# Altium PCB MB1134.PcbDoc (part 1 of 2)
Units mm, origin at the board's own origin, x right, y up, seen from the top; angles counter-clockwise.
Board outline 53.34 x 88.9 mm, 2 copper layers (Top Layer, Bottom Layer), stack 1.571 mm thick; 105 components, 124 nets, 401 pads, 201 vias.
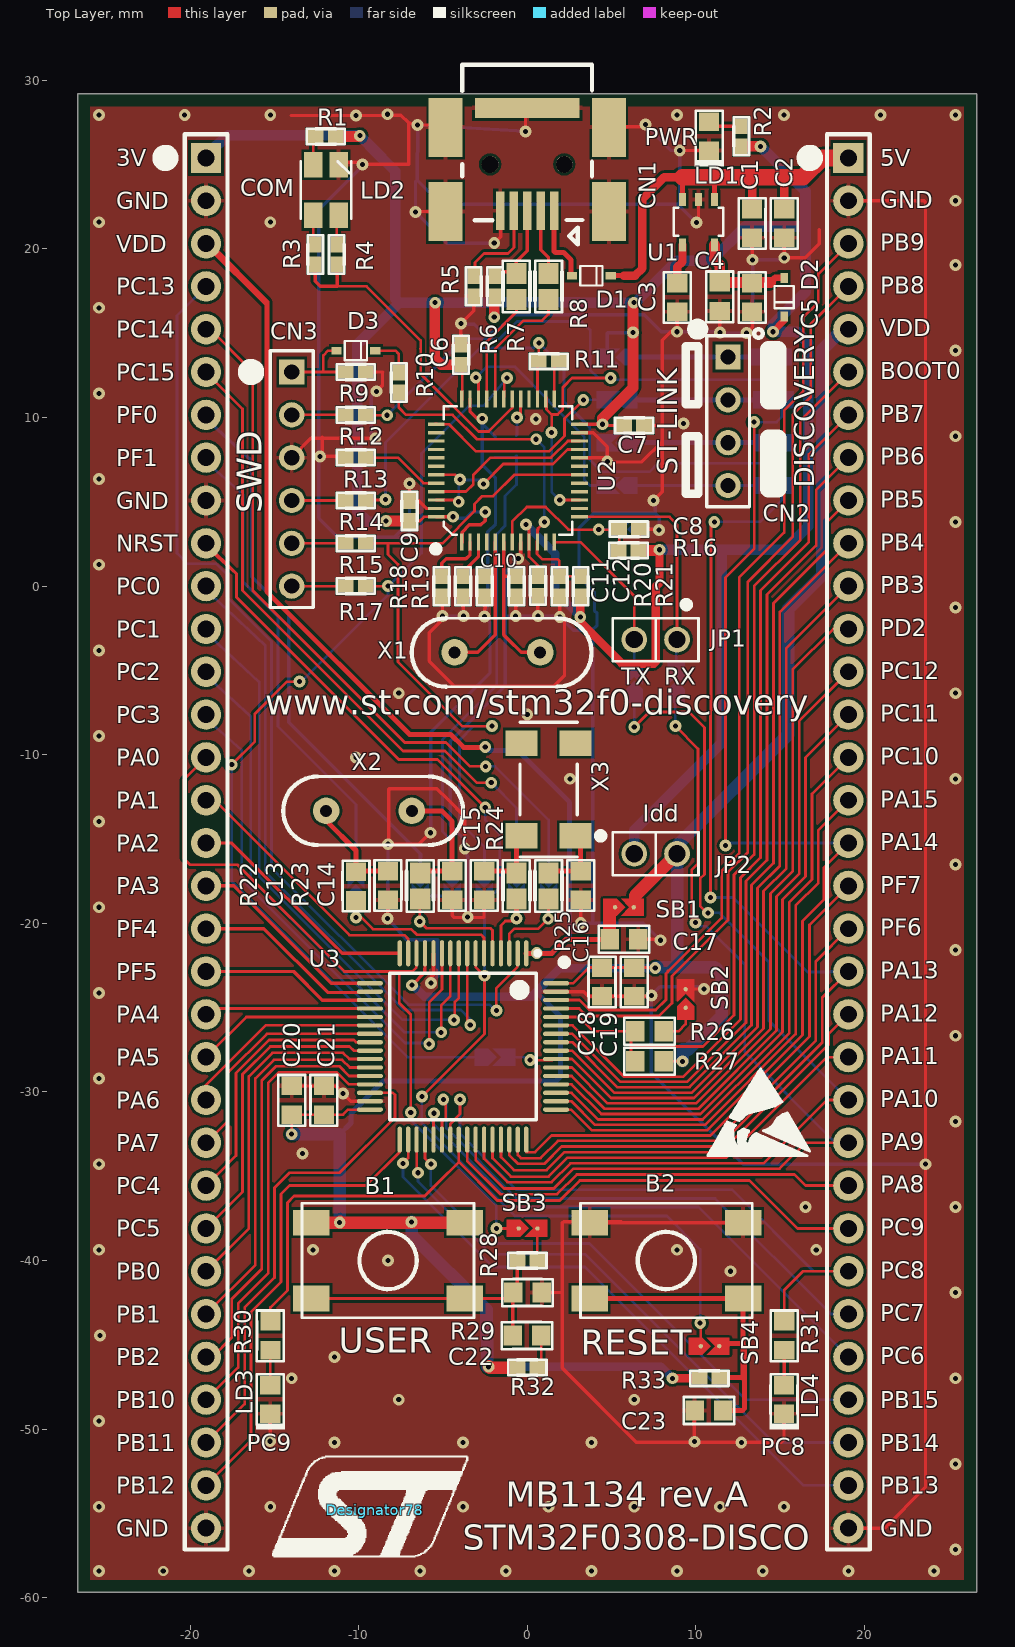
[diagram p0: Top Layer view]
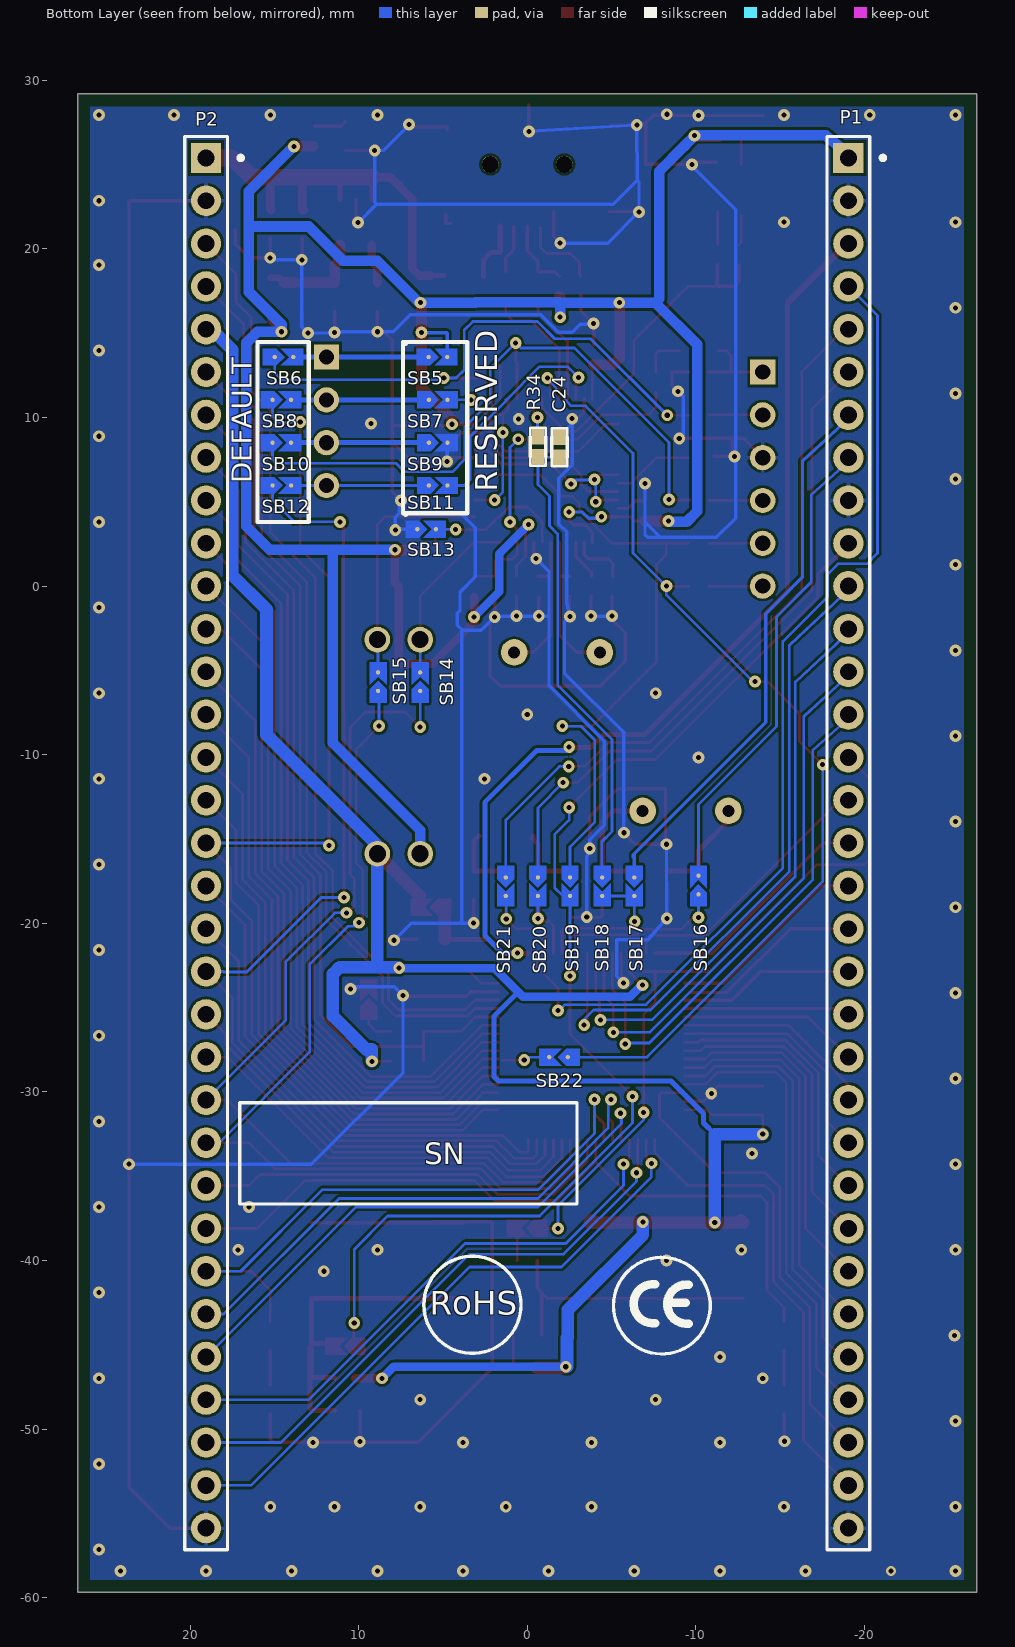
[diagram p1: Bottom Layer view, seen from below]

## Layer stack, top to bottom
Top Layer: signal copper 0.0356
Dielectric: core 1.5, FR-4, Dk 4.8
Bottom Layer: signal copper 0.0356

## Board outline
-26.67,-59.69 26.67,-59.69 26.67,29.21 -26.67,29.21

## Design rules (kind name [scope] priority, off if disabled: settings)
Clearance [All] p1: gap=0.15
ComponentClearance [All] p1: gap=0.254 collisioncheckmode=3 verticalgap=0.254
PolygonConnect PolygonConnect_1 [isvia] p1: connectstyle=Direct reliefconductorwidth=0.254 reliefentries=4 polygonreliefangle="90 Angle"
PolygonConnect [All] p2: connectstyle=Relief reliefconductorwidth=0.254 reliefentries=4 polygonreliefangle="90 Angle"
RoutingVias [All] p1: holewidth=0.711 width=0.7 viastyle="Through Hole" minholewidth=0.3 minwidth=0.7 maxholewidth=0.3 maxwidth=1.27
SolderMaskExpansion [All] p1: expansion=0.05
TestPointUsage [All] p1: valid=0 allowmultiple=FALSE
Testpoint [All] p1: side=3 testpointundercomponent=TRUE minsize=1.016 maxsize=2.54 preferedsize=1.524 minholesize=0 maxholesize=1.016 preferedholesize=0.813 testpointgrid=0.025 style=297 order=0123456789
Width [All] p1: maxlimit=1 minlimit=0.15 preferedwidth=0.16
18 further rules are at their usual default settings.

## Classes and differential pairs
component class MB1034: P1 P2

## Components (designator, comment, footprint, x,y, rotation, side; value= is the part's Value field where it differs from the comment)
B1 "SW-PUSH-CMS" BP1CMS -8.255,-40.005 r270 top (schematic designator B2)
B2 "SW-PUSH-CMS" BP1CMS 8.255,-40.005 r90 top (schematic designator B1)
C1 "1µF_X5R_0603" 0603C 13.335,21.539 r90 top (schematic designator C9)
C2 "100nF" 0603C 15.24,21.539 r90 top (schematic designator C13)
C3 "10nF_X7R_0603" 0603C 8.89,17.145 r90 top (schematic designator C11)
C4 "1µF_X5R_0603" 0603C 11.43,17.145 r270 top (schematic designator C10)
C5 "100nF" 0603C 13.335,17.145 r90 top (schematic designator C12)
C6 "100nF" 0402C -3.937,13.716 r0 top (schematic designator C5)
C7 "100nF" 0402C 6.325,9.525 r270 top (schematic designator C6)
C8 "100nF" 0402C 6.02,3.378 r270 top (schematic designator C3)
C9 "100nF" 0402C -6.985,4.445 r0 top (schematic designator C8)
C10 "20pF" 0402C -2.54,0 r180 top (schematic designator C1)
C11 "20pF" 0402C -0.635,0 r180 top (schematic designator C2)
C12 "100nF" 0402C 0.635,0 r0 top (schematic designator C7)
C13 "20pF" 0603C -8.255,-17.78 r270 top (schematic designator C24)
C14 "20pF" 0603C -4.445,-17.78 r270 top (schematic designator C23)
C15 "6.8pF" 0603C -2.54,-17.78 r270 top (schematic designator C17)
C16 "6.8pF" 0603C 3.175,-17.78 r270 top
C17 "1uF" 0603C 5.715,-20.955 r180 top (schematic designator C15)
C18 "1uF" 0603C 4.445,-23.495 r270 top (schematic designator C21)
C19 "100nF" 0603C 6.35,-23.495 r270 top (schematic designator C22)
C20 "100nF" 0603C -13.97,-30.48 r90 top
C21 "100nF" 0603C -12.065,-30.48 r90 top (schematic designator C19)
C22 "100nF" 0603C 0,-44.45 r0 top (schematic designator C18)
C23 "100nF" 0603C 10.795,-48.895 r0 top (schematic designator C14)
C24 "20pF" 0402C -1.905,8.255 r0 bottom (schematic designator C4)
CN1 "5075BMR-05-SM" USB-MINI-B-SMD 0,25.019 r0 top (schematic designator CN3)
CN2 "Header 4" "Header 4" 11.913,13.589 r270 top
CN3 "Header 6" HDR1X6 -13.97,12.7 r270 top (schematic designator CN1)
D1 "BAT60JFILM" SOD323/A 3.81,18.415 r180 top (schematic designator D3)
D2 "BAT60JFILM" SOD323/A 15.24,17.145 r90 top
D3 "BAT60JFILM" SOD323/A -10.16,13.97 r180 top (schematic designator D1)
Designator2 "Comment" LOGO_ST_2012_12mm_TO -84.531,-154.102 r180 bottom
Designator3 "Comment" LOGO_ST_2012_12mm_TO 73.838,-153.848 r0 top
Designator78 "Comment" LOGO_ST_2012_12mm_TO -9.042,-54.788 r0 top
JP1 "" SIP2/2.54 8.89,-3.175 r180 top (schematic designator JP2)
JP2 "" SIP2/2.54 6.35,-15.875 r0 top (schematic designator JP3)
LD1 "RED" 0603D 10.795,26.67 r270 top (schematic designator LD2)
LD2 "LD_BICOLOR_CMS" HSMF-A201 -11.938,23.495 r270 top (schematic designator LD1)
LD3 "green" 0603D -15.24,-48.26 r270 top
LD4 "blue" 0603D 15.24,-48.26 r270 top
P1 "Header 33" HDR1X33 -19.05,25.4 r270 bottom
P2 "Header 33" HDR1X33 19.05,25.4 r270 bottom
R1 "0" 0402R -11.938,26.67 r90 top (schematic designator R18)
R2 "1K" 0402R 12.7,26.67 r0 top (schematic designator R16)
R3 "100" 0402R -12.573,19.685 r180 top (schematic designator R17)
R4 "100" 0402R -11.303,19.685 r180 top (schematic designator R15)
R5 "100K" 0402R -3.175,17.78 r0 top (schematic designator R22)
R6 "1K5" 0402R -1.905,17.78 r0 top (schematic designator R19)
R7 "0" 0603R-GS -0.635,17.78 r270 top (schematic designator R21)
R8 "0" 0603R-GS 1.27,17.78 r270 top (schematic designator R20)
R9 "10K" 0402R -10.16,12.7 r90 top (schematic designator R3)
R10 "100" 0402R -7.62,12.065 r0 top (schematic designator R5)
R11 "100" 0402R 1.27,13.335 r270 top (schematic designator R13)
R12 "22" 0402R -10.16,10.16 r90 top (schematic designator R6)
R13 "100K" 0402R -10.16,7.62 r90 top (schematic designator R1)
R14 "22" 0402R -10.16,5.08 r90 top (schematic designator R7)
R15 "22" 0402R -10.16,2.54 r90 top (schematic designator R8)
R16 "100K" 0402R 6.02,2.108 r90 top (schematic designator R10)
R17 "22" 0402R -10.16,0 r90 top (schematic designator R9)
R18 "10K" 0402R -5.08,0 r180 top (schematic designator R2)
R19 "10K" 0402R -3.81,0 r180 top (schematic designator R4)
R20 "4K7" 0402R 3.175,0 r180 top (schematic designator R12)
R21 "4K7" 0402R 1.905,0 r180 top (schematic designator R14)
R22 "390" 0603R -10.16,-17.78 r90 top (schematic designator R34)
R23 "0" 0603R-GS -6.35,-17.78 r270 top (schematic designator R33)
R24 "0" 0603R-GS -0.635,-17.78 r270 top (schematic designator R29)
R25 "0" 0603R-GS 1.27,-17.78 r270 top (schematic designator R28)
R26 "510" 0603R 7.239,-26.416 r180 top (schematic designator R27)
R27 "10K" 0603R 7.239,-28.194 r180 top (schematic designator R26)
R28 "330" 0402R 0,-40.005 r270 top (schematic designator R31)
R29 "220K" 0603R 0,-41.91 r180 top (schematic designator R32)
R30 "330" 0603R -15.24,-44.45 r90 top (schematic designator R23)
R31 "660" 0603R 15.24,-44.45 r90 top (schematic designator R24)
R32 "100" 0402R 0,-46.355 r270 top (schematic designator R30)
R33 "100K" 0402R 10.795,-46.99 r270 top (schematic designator R25)
R34 "100" 0402R -0.635,8.255 r180 bottom (schematic designator R11)
SB1 "Circuit Breaker" JP2_SMD 5.715,-19.05 r0 top (schematic designator SB14)
SB2 "Circuit Breaker" JP2_SMD 9.398,-24.511 r90 top (schematic designator SB13)
SB3 "Circuit Breaker" JP2_SMD 0,-38.1 r0 top (schematic designator SB17)
SB4 "Circuit Breaker" JP2_SMD 10.795,-45.085 r0 top (schematic designator SB12)
SB5 "Circuit Breaker" JP2_SMD 5.349,13.589 r180 bottom (schematic designator SB4)
SB6 "Circuit Breaker" JP2_SMD 14.478,13.589 r180 bottom (schematic designator SB3)
SB7 "Circuit Breaker" JP2_SMD 5.334,11.049 r180 bottom (schematic designator SB6)
SB8 "Circuit Breaker" JP2_SMD 14.605,11.049 r180 bottom (schematic designator SB5)
SB9 "Circuit Breaker" JP2_SMD 5.334,8.509 r180 bottom (schematic designator SB8)
SB10 "Circuit Breaker" JP2_SMD 14.605,8.509 r180 bottom (schematic designator SB7)
SB11 "Circuit Breaker" JP2_SMD 5.334,5.969 r180 bottom (schematic designator SB10)
SB12 "Circuit Breaker" JP2_SMD 14.605,5.969 r180 bottom (schematic designator SB9)
SB13 "Circuit Breaker" JP2_SMD 6.02,3.378 r180 bottom (schematic designator SB11)
SB14 "Circuit Breaker" JP2_SMD 6.35,-5.715 r90 bottom (schematic designator SB21)
SB15 "Circuit Breaker" JP2_SMD 8.846,-5.715 r90 bottom (schematic designator SB22)
SB16 "Circuit Breaker" JP2_SMD -10.16,-17.78 r90 bottom (schematic designator SB19)
SB17 "Circuit Breaker" JP2_SMD -6.35,-17.78 r270 bottom (schematic designator SB20)
SB18 "Circuit Breaker" JP2_SMD -4.445,-17.78 r270 bottom
SB19 "Circuit Breaker" JP2_SMD -2.54,-17.78 r270 bottom (schematic designator SB1)
SB20 "Circuit Breaker" JP2_SMD -0.635,-17.78 r270 bottom (schematic designator SB16)
SB21 "Circuit Breaker" JP2_SMD 1.27,-17.78 r270 bottom (schematic designator SB15)
SB22 "Circuit Breaker" JP2_SMD -1.905,-27.94 r0 bottom (schematic designator SB2)
U1 "LD3985M33R" SOT-23-5L 10.16,21.59 r270 top (schematic designator U2)
U2 "STM32F103C8T6" "QFP48 7X7" -1.143,6.858 r0 top (schematic designator U1)
U3 "STM32F051R8T6" LQFP64 -3.81,-27.305 r270 top
X1 "8MHz" XTAL1 0.762,-3.937 r180 top
X2 "8MHz" XTAL1 -6.858,-13.335 r180 top (schematic designator X3)
X3 "MC306-G-06Q-32.768 (JFVNY)" MC306-CRYSTAL 1.27,-12.065 r90 top (schematic designator X2)

## Footprints (in the part's own frame and the unit in brackets; to place one, negate y for a bottom-side part, rotate by r counter-clockwise, add the part's x,y. Pads: shape width x height; smd on the part's side, far side on the other; paste and mask are expansions set on the pad)
0402C [mil]
  rect 30x37 smd: 1(0,24) 2(0,-23)
  silkscreen extent -18,-44 18,45
0402R [mil]
  rect 30x37 smd: 1(0,24) 2(0,-23)
  silkscreen extent -18,-44 18,45
0603C [mm]
  rect 1.1x1.2 smd: 1(-0.869,-0.005) 2(0.831,-0.005)
  silkscreen extent -1.52,-0.81 1.48,0.79
0603D [mm]
  rect 1.1x1.2 smd: 1(-0.869,-0.005) 2(0.831,-0.005)
  silkscreen extent -1.52,-0.86 1.77,0.86
0603R [mm]
  rect 1.1x1.2 smd: 1(-0.869,-0.005) 2(0.831,-0.005)
  silkscreen extent -1.52,-0.81 1.48,0.79
0603R-GS [mm]
  rect 1.25x1.2 smd: 1(-0.775,0) 2(0.775,0)
  silkscreen extent -1.53,-0.81 1.53,0.79
BP1CMS [mm]
  rect 1.52x2.16 smd: 1(-2.25,-4.55) 2(-2.25,4.55) 3(2.25,-4.55) 4(2.25,4.55)
  silkscreen extent -3.4,-5.1 3.4,5.1
HDR1X6 [mm]
  rect 1.5x1.5 hole 0.9: 1(0,0)
  round 1.5 hole 0.9: 2(2.54,0) 3(5.08,0) 4(7.62,0) 5(10.16,0) 6(12.7,0)
  silkscreen extent -1.27,-1.27 13.97,1.27
HDR1X33 [mm]
  rect 1.8x1.8 hole 1: 1(0,0)
  round 1.8 hole 1: 2(2.54,0) 3(5.08,0) 4(7.62,0) 5(10.16,0) 6(12.7,0) 7(15.24,0) 8(17.78,0) 9(20.32,0) 10(22.86,0) 11(25.4,0) 12(27.94,0) 13(30.48,0) 14(33.02,0) 15(35.56,0) 16(38.1,0) 17(40.64,0) 18(43.18,0) 19(45.72,0) 20(48.26,0) 21(50.8,0) 22(53.34,0) 23(55.88,0) 24(58.42,0) 25(60.96,0) 26(63.5,0) 27(66.04,0) 28(68.58,0) 29(71.12,0) 30(73.66,0) 31(76.2,0) 32(78.74,0) 33(81.28,0)
  silkscreen extent -1.27,-1.27 82.55,2.17
"Header 4" [mm]
  rect 1.5x1.5 hole 0.9: 1(0,0)
  round 1.5 hole 0.9: 2(2.54,0) 3(5.08,0) 4(7.62,0)
  silkscreen extent -1.27,-1.27 8.89,1.27
HSMF-A201 [mm]
  rect 1.5x1.1 smd: 1(-1.5,0.75) 2(1.5,0.75) 3(1.5,-0.75) 4(-1.5,-0.75)
  silkscreen extent -1.7,-1.5 1.7,1.5
JP2_SMD [mil]
  round 10 smd: 1(-19.69,0) 2(23.62,0)
  Top Layer region: -47.24,-19.68 -47.24,19.69 -15.75,19.69 3.94,0 -15.75,-19.68
  Top Layer region: -5.91,19.69 13.78,0 -5.91,-19.68 47.24,-19.68 47.24,19.69
LOGO_ST_2012_12mm_TO [mm]
LQFP64 [mm] "Thin QFP, 64-Leads, Body 10x10mm, Pitch 0.5mm, IPC High Density"
  oval 1.55x0.25 smd: 1(-5.525,3.75) 2(-5.525,3.25) 3(-5.525,2.75) 4(-5.525,2.25) 5(-5.525,1.75) 6(-5.525,1.25) 7(-5.525,0.75) 8(-5.525,0.25) 9(-5.525,-0.25) 10(-5.525,-0.75) 11(-5.525,-1.25) 12(-5.525,-1.75) 13(-5.525,-2.25) 14(-5.525,-2.75) 15(-5.525,-3.25) 16(-5.525,-3.75) 33(5.525,-3.75) 34(5.525,-3.25) 35(5.525,-2.75) 36(5.525,-2.25) 37(5.525,-1.75) 38(5.525,-1.25) 39(5.525,-0.75) 40(5.525,-0.25) 41(5.525,0.25) 42(5.525,0.75) 43(5.525,1.25) 44(5.525,1.75) 45(5.525,2.25) 46(5.525,2.75) 47(5.525,3.25) 48(5.525,3.75)
  oval 0.25x1.55 smd: 17(-3.75,-5.525) 18(-3.25,-5.525) 19(-2.75,-5.525) 20(-2.25,-5.525) 21(-1.75,-5.525) 22(-1.25,-5.525) 23(-0.75,-5.525) 24(-0.25,-5.525) 25(0.25,-5.525) 26(0.75,-5.525) 27(1.25,-5.525) 28(1.75,-5.525) 29(2.25,-5.525) 30(2.75,-5.525) 31(3.25,-5.525) 32(3.75,-5.525) 49(3.75,5.525) 50(3.25,5.525) 51(2.75,5.525) 52(2.25,5.525) 53(1.75,5.525) 54(1.25,5.525) 55(0.75,5.525) 56(0.25,5.525) 57(-0.25,5.525) 58(-0.75,5.525) 59(-1.25,5.525) 60(-1.75,5.525) 61(-2.25,5.525) 62(-2.75,5.525) 63(-3.25,5.525) 64(-3.75,5.525)
  silkscreen extent -5.65,-4.35 4.35,4.55, body extent -5,-5 5,5, height 1.6
MC306-CRYSTAL [mm] "Quartz Crystal, SM; Body 8.0 x 3.8 (inc. leads) mm (LxW)"
  rect 1.5x1.9 smd: 1(-2.75,-1.6) 2(2.75,-1.6) 3(2.75,1.6) 4(-2.75,1.6)
  silkscreen extent -4,-3.23 4,1.7
"QFP48 7X7" [mm]
  rect 0.2x1 smd: 1(-2.75,-4.25) 2(-2.25,-4.25) 3(-1.75,-4.25) 4(-1.25,-4.25) 5(-0.75,-4.25) 6(-0.25,-4.25) 7(0.25,-4.25) 8(0.75,-4.25) 9(1.25,-4.25) 10(1.75,-4.25) 11(2.25,-4.25) 12(2.75,-4.25) 25(2.75,4.25) 26(2.25,4.25) 27(1.75,4.25) 28(1.25,4.25) 29(0.75,4.25) 30(0.25,4.25) 31(-0.25,4.25) 32(-0.75,4.25) 33(-1.25,4.25) 34(-1.75,4.25) 35(-2.25,4.25) 36(-2.75,4.25)
  rect 1x0.2 smd: 13(4.25,-2.75) 14(4.25,-2.25) 15(4.25,-1.75) 16(4.25,-1.25) 17(4.25,-0.75) 18(4.25,-0.25) 19(4.25,0.25) 20(4.25,0.75) 21(4.25,1.25) 22(4.25,1.75) 23(4.25,2.25) 24(4.25,2.75) 37(-4.25,2.75) 38(-4.25,2.25) 39(-4.25,1.75) 40(-4.25,1.25) 41(-4.25,0.75) 42(-4.25,0.25) 43(-4.25,-0.25) 44(-4.25,-0.75) 45(-4.25,-1.25) 46(-4.25,-1.75) 47(-4.25,-2.25) 48(-4.25,-2.75)
  silkscreen extent -3.81,-3.81 3.81,3.81
SIP2/2.54 [mil]
  round 60 hole 40: 1(0,0) 2(100,0)
  silkscreen extent -50,-50 150,50
SOD323/A [mm]
  rect 0.6x0.45 smd: 1(1.143,0) 2(-1.143,0)
  silkscreen extent -0.67,-0.57 0.67,0.57
SOT-23-5L [mil]
  rect 30x16 smd: 1(-53.15,37.4) 2(-53.15,0) 3(-53.15,-37.4) 4(53.15,-37.4) 5(53.15,37.4)
  silkscreen extent -33,-58 32,57
USB-MINI-B-SMD [mm]
  rect 2x3.5 smd: 0(-4.853,-2.8) 0(-4.853,2.2) 0(4.847,-2.8) 0(4.847,2.2)
  rect 6.2x1.2 smd: 0(0,3.35)
  rect 0.508x2.3 smd: 1(1.597,-2.75) 2(0.797,-2.75) 3(-0.003,-2.75) 4(-0.803,-2.75) 5(-1.603,-2.75)
  round 1 hole 1 unplated: 6(2.194,0) 7(-2.2,0)
  silkscreen extent -3.85,-4.76 3.85,5.9
XTAL1 [mil]
  round 62 hole 28: 1(-0.36,-0.2) 2(199.64,-0.2)
  silkscreen extent -120,-80 300,80

## Part data
B1 B2: "Non-Open Push-Button 0.1A 24V"
C1 C4: library part "CAP SMD 0603  X5R 1礔 25V 10%", "0603  X5R 1礔"
C2 C5 C6 C7 C8 C9 C10 C11 C12 C18 C19 C20 C21 C24: library part Cap, "Capacitor"
C3: library part "CAP SMD 0603  X7R 10000PF 50V 10%", "0603  X7R 10NF"
C13 C14 C15 C16 C17 C22 C23: library part CAP, "Capacitor"
CN1: library part "USB-MINI-typeB connector"
CN2: "Header, 4-Pin"
CN3: "Header, 6-Pin"
JP1 JP2: library part JP2
LD1 LD3 LD4: library part PHOTO
LD2: "Bicolor Led"
P1 P2: library part "Header 30", "Header, 30-Pin"
R1 R2 R3 R4 R5 R6 R7 R8 R9 R10 R11 R12 R13 R14 R15 R16 R17 R18 R19 R20 R21 R27 R28 R29 R32 R33 R34: library part res1, "Resistor"
R22 R23 R24 R25 R26: library part Res1, "Resistor"
R30 R31: library part RES1
U1: "Ultra low drop-low noise BiCMOS voltage, regulators low ESR capacitors compatible"
U3: library part Stingray_64K_LQFP64
X1 X2: library part XTAL, "Crystal Oscillator"
X3: library part MC306

## Via types
v1: diameter 0.7, hole 0.3, Top Layer to Bottom Layer, 200 vias
v2: diameter 0.6, hole 0.3, Top Layer to Bottom Layer, 1 vias

## Nets (pads, with @x,y where several pads share a name; then routed paths per layer and width w, separated by ;. In a path a pad name is that pad's centre, name@x,y a point inside that pad or via, vN(x,y) a via of type N, cw(c..) or ccw(c..) an arc to the next point about the centre after c; other vN are vias at no path point)
3V: C6.2 C7.2 C9.2 C12.1 D2.2 JP2.1 P1.1 R1.2 R2.2 R6.2 R16.2 R20.1 SB5.2 U2.1 U2.9 U2.24 U2.36 U2.48 | length 178.5
  Top Layer w0.16: C9.2@-6.985,3.861 -6.375,3.861 -6.128,4.108 U2.48@-5.393,4.108 ; C6.2@-3.937,13.132 -3.861,13.056 -3.861,11.108 U2.36@-3.861,11.074 ; v1(-0.076,3.658) -0.051,3.658 0.107,3.5 U2.9@0.107,2.608 0.107,1.747 0.635,1.219 C12.1@0.635,0.61
  Top Layer w0.2: U2.48@-5.393,4.108 -4.401,4.108 v1(-4.394,4.115) ; U2.1@-3.861,2.565 -3.861,2.608 -3.861,3.2 -3.429,3.632 -2.743,3.632 -2.489,3.886 v1(-2.489,4.394) ; U2.24@3.107,9.608 4.057,9.608 ; 4.064,9.601 v1(4.47,9.601) ; v1@4.47,9.525 C7.2@5.74,9.525
  Top Layer w0.4: v1(14.58,15.088) 15.24,15.748 D2.2@15.24,16.002
  Top Layer w0.5: R20.1@3.15,-0.635 v1(3.15,-1.829) 3.15,-2.134 5.613,-4.597 7.518,-4.597 7.62,-4.496 7.62,-0.025 7.849,0.203 v1(7.849,2.159)
  Top Layer w0.635: R1.2@-11.354,26.67 v1@-9.957,26.67 ; v1(-8.382,3.861) C9.2@-6.985,3.861 C9.2@-6.934,3.861 ; v1@-5.486,16.789 -5.486,13.513 -5.105,13.132 C6.2@-3.937,13.132 ; v1(-1.956,15.951) -1.956,17.145 R6.2@-1.905,17.196 ; v1(4.47,9.601) 4.47,9.957 6.274,11.76 v1(6.274,15.037) v1@6.274,16.764 ; R16.2@6.604,2.108 v1@7.798,2.108 ; R2.2@12.7,26.086 v1(13.843,26.086)
  Bottom Layer w0.2: v1(-4.394,4.115) -4.301,4.021 -3.649,4.021 -3.277,4.394 v1(-2.489,4.394) ; SB5.2@4.749,13.589 4.749,15.011 4.775,15.037 v1(6.274,15.037)
  Bottom Layer w0.5: v1(-0.076,3.658) 1.651,1.93 1.651,-0.33 v1(3.15,-1.829)
  Bottom Layer w0.635: P1.1@-19.304,25.4 -19.155,25.525 -18.687,25.919 -17.704,26.746 v1@-9.957,26.746 ; v1(-9.931,26.721) -9.347,26.137 -9.347,26.086 ; -9.322,26.111 -7.827,24.616 -7.827,17.043 -7.598,16.815 ; v1@-8.433,3.81 -9.449,3.81 -10.084,4.445 -10.084,14.329 -7.598,16.815 ; v1(-1.956,15.951) -1.956,16.789 -1.93,16.815 ; 3.073,16.815 v1(6.325,16.815) ; 3.073,16.84 -1.905,16.84 -1.93,16.815 ; JP2.1@6.172,-15.697 JP2.1@6.35,-15.875 6.35,-14.478 11.532,-9.296 11.532,2.159 ; v1@6.401,16.815 8.473,18.887 8.89,19.304 10.922,19.304 12.954,21.336 16.51,21.336 ; v1(7.849,2.159) 11.532,2.159 ; v1(13.843,26.086) 16.51,23.419 16.51,21.336 ; -7.598,16.815 v1(-5.461,16.815) -1.93,16.815 ; 11.532,2.159 15.265,2.159 16.662,3.556 16.662,14.427 16.002,15.088 v1(14.58,15.088) 14.58,15.519 16.51,17.45 16.51,21.336
5V: C1.2 C2.2 D1.2 P2.1 U1.1 U1.3 | length 26
  Top Layer w0.3: D1.2@4.953,18.415 5.715,18.415 ; U1.3@9.21,22.94 9.21,24.257 ; U1.1@11.11,22.94 11.11,24.257
  Top Layer w0.5: 5.715,18.415 6.401,18.415 6.833,18.847 6.833,22.962 8.128,24.257 9.21,24.257 ; C1.2@13.233,22.301 C1.2@13.34,22.301 ; 13.31,24.257 13.34,24.227 C1.2@13.34,22.371 ; C2.2@15.176,22.301 C2.2@15.245,22.371 15.245,24.252 15.24,24.257
  Top Layer w1: 9.21,24.257 11.11,24.257 13.31,24.257 15.24,24.257 16.358,24.257 17.501,25.4 P2.1@19.025,25.4
AIN_1: R10.2 R20.2 R21.2 U2.10 | length 20.7
  Top Layer w0.16: R10.2@-7.62,11.481 -7.62,10.592 -7.188,10.16 -4.42,10.16 -2.972,8.712 v1(0.533,8.712) ; U2.10@0.584,2.667 0.584,2.608 0.584,1.905 0.889,1.6 1.803,1.6 1.905,1.499 R21.2@1.905,0.584 R20.2@3.175,0.584 ; U2.10@0.607,2.608 0.607,3.353 ; 0.635,3.353 0.635,3.429 v1(1.016,3.81)
  Bottom Layer w0.16: v1(0.533,8.712) 1.016,8.23 v1(1.016,3.81)
BOOT0: P2.6 R26.2 R27.2 U3.60 | length 54.4
  Top Layer w0.16: U3.60@1.715,-25.555 3.076,-25.555 3.932,-26.411 6.154,-26.411 6.154,-27.305 ; R27.2@6.154,-28.189 6.154,-27.305 ; P2.6@19.05,12.7 19.05,12.675 16.204,9.829 16.204,2.742 13.462,0 13.462,-15.926 12.268,-17.12 12.268,-25.451 10.414,-27.305 6.154,-27.305
GND: B2.3 B2.4 C1.1 C2.1 C3.1 C4.2 C5.1 C6.1 C7.1 C8.1 C9.1 C10.1 C11.1 C12.2 C13.2 C14.2 C15.2 C16.2 C17.1 C18.2 C19.2 C20.2 C21.2 C23.1 C24.2 CN1.0 CN1.5 CN3.3 LD1.2 LD2.1 LD3.2 LD4.2 P1.2 P1.9 P1.33 P2.2 P2.33 R5.2 R9.2 R13.1 R18.1 R19.1 R21.1 R29.1 SB2.2 SB9.2 SB13.1 U1.2 U2.8 U2.20 U2.23 U2.35 U2.47 U3.12 U3.31 U3.63 | length 500.1
  Top Layer w0.2: P1.9@-19.66,5.08 P1.9@-19.05,5.08 ; P1.2@-19.304,22.86 -19.171,22.987 P1.2@-18.751,23.386 ; P1.2@-19.05,22.86 P1.2@-18.771,22.86 ; v1(-15.265,-50.724) -15.245,-50.703 LD3.2@-15.245,-49.091 ; -13.995,27.915 v1(-10.16,27.915) -8.661,27.915 ; CN3.3@-13.97,7.62 -12.827,8.763 -12.167,8.763 ; C20.2@-13.965,-29.649 C21.2@-12.06,-29.649 -11.372,-29.649 v1(-10.922,-30.099) -10.466,-30.555 U3.31@-9.335,-30.555 ; v1(-12.294,7.696) R13.1@-11.049,7.696 ; v1@-12.167,7.823 -12.167,8.763 ; -12.167,8.839 -12.167,8.763 ; LD2.1@-11.227,25.146 -11.188,25.146 -9.906,25.146 v1(-9.779,25.019) -7.036,25.019 -7.036,27.483 ; R9.2@-9.576,12.7 -8.56,12.7 -8.585,12.675 -8.585,11.913 v1(-8.941,11.557) ; v1(-9.017,8.763) -12.167,8.763 ; -8.661,27.94 -8.28,27.94 -7.493,27.94 -7.036,27.483 ; v1(-8.28,-19.71) C13.2@-8.26,-18.611 ; v1(-6.985,6.095) C9.1@-6.985,5.055 -6.426,5.055 -5.98,4.608 U2.47@-5.393,4.608 ; v1(-6.629,22.2) -6.61,22.219 CN1.0@-4.853,22.219 ; v1(-5.74,-14.63) -6.421,-15.311 -8.204,-15.311 -8.204,-12.04 -8.179,-12.014 -5.359,-12.014 -4.721,-12.652 -3.708,-13.665 v1(-3.708,-15.57) ; v1(-5.715,-23.546) -5.715,-23.216 -5.56,-23.061 U3.12@-5.56,-21.78 ; R18.1@-5.029,-0.61 v1(-5.029,-1.778) -5.029,-1.981 -5.817,-2.769 -5.817,-4.445 -4.318,-5.944 1.575,-5.944 2.21,-5.309 2.21,-2.108 v1(1.93,-1.829) R21.1@1.93,-0.66 ; CN1.0@-4.978,27.356 v1(-6.502,27.356) -7.036,27.483 ; C14.2@-4.45,-18.611 -4.45,-19.538 -4.328,-19.66 -3.531,-19.66 -2.565,-19.66 -2.565,-18.632 C15.2@-2.545,-18.611 ; C6.1@-3.937,14.326 v1(-3.937,15.57) -3.175,16.332 R5.2@-3.175,17.196 R5.2@-3.175,17.247 ; R19.1@-3.81,-0.61 -3.785,-0.635 v1(-3.785,-1.778) ; U2.35@-3.393,11.108 -3.393,10.353 -2.972,9.931 v1(-2.667,9.931) ; v1(-2.54,-1.803) -2.489,-1.168 -2.489,-0.66 C10.1@-2.54,-0.61 ; v1(-1.956,20.345) -1.575,20.726 CN1.5@-1.575,22.2 ; v1(-0.686,-1.778) C11.1@-0.686,-0.635 ; v1(-0.533,1.626) -0.393,1.766 U2.8@-0.393,2.608 ; v1(-0.102,26.975) -0.102,28.369 CN1.0@-0.102,28.524 ; v1(0.635,-1.778) C12.2@0.635,-0.584 ; R29.1@0.869,-41.905 2.052,-41.905 2.083,-41.935 ; U3.63@1.715,-24.055 3.354,-24.055 3.625,-24.326 C18.2@4.44,-24.326 C19.2@6.345,-24.326 ; U2.23@2.743,9.093 3.107,9.093 3.912,9.093 4.75,8.255 v1(4.75,7.391) ; U2.20@3.107,7.608 v1@4.736,7.608 ; C16.2@3.17,-18.611 3.17,-19.985 v1(3.175,-19.99) ; B2.4@3.705,-37.755 B2.3@12.805,-37.755 ; CN1.0@4.496,21.514 4.826,21.514 CN1.0@4.826,22.047 ; CN1.0@4.705,27.076 CN1.0@4.847,27.219 ; v1@4.75,7.366 6.807,7.366 8.001,8.56 ; CN1.0@4.75,27.254 7.01,27.254 v1(7.01,27.381) ; 5.577,-37.694 3.705,-37.694 2.159,-37.694 2.083,-37.77 2.083,-41.935 ; C19.2@6.375,-24.333 7.366,-24.333 v1(7.366,-24.282) ; C17.1@6.584,-20.95 7.844,-20.95 v1(7.899,-21.006) ; C8.1@6.629,3.378 7.595,3.378 7.734,3.238 7.874,3.099 v1(7.823,3.327) ; C7.1@6.934,9.525 8.001,9.525 ; v1(7.493,5.08) 8.001,5.588 8.001,8.56 ; v1@8.89,15.093 8.514,15.093 8.001,14.58 8.001,9.525 ; v1@8.895,15.093 C3.1@8.895,16.276 ; v1(9.049,25.839) LD1.2@10.79,25.839 ; SB2.2@9.398,-23.911 9.408,-23.901 v1(10.49,-23.901) ; v1@9.906,-50.775 6.477,-50.775 2.083,-46.38 2.083,-41.935 ; C23.1@9.926,-48.9 9.906,-48.92 9.906,-50.724 v1(9.931,-50.749) ; v1@9.931,-50.775 12.7,-50.775 15.078,-50.775 15.235,-50.617 LD4.2@15.235,-49.091 ; v1(10.033,21.565) 10.16,21.692 U1.2@10.16,22.94 ; v1@11.425,15.042 C4.2@11.425,16.314 ; v1(13.005,15.011) 13.36,15.367 C5.1@13.36,16.256 ; v1@13.34,19.385 C1.1@13.34,20.671 ; C2.1@15.245,20.671 v1(15.245,19.477) 16.48,19.477 17.323,20.32 17.323,21.133 ; P2.33@19.05,-55.88 21.209,-55.88 23.622,-53.467 v1(23.622,-34.29) 23.622,22.784 23.546,22.86 P2.2@19.05,22.86 ; 8.001,8.56 8.001,9.525
  Bottom Layer w0.2: v1@-12.37,7.696 -12.37,22.327 v1@-9.728,24.968 ; v1(-12.294,7.696) -12.37,7.62 -12.37,4.039 -11.227,2.896 -7.899,2.896 ; v1(-9.017,8.763) -9.246,8.992 -9.246,11.252 v1(-8.941,11.557) ; v1(-8.26,-15.311) v1(-8.28,-19.71) -7.163,-20.98 -5.309,-20.98 -5.309,-23.139 v1(-5.715,-23.546) ; v1(-6.985,6.095) -6.985,3.81 ; v1@-5.715,-14.63 -5.715,-8.661 -2.21,-5.156 -2.21,-2.134 v1(-2.54,-1.803) -2.337,-1.016 -2.337,3.226 -1.88,3.683 -1.88,6.401 -2.667,7.188 v1@-2.667,9.627 ; v1(-5.029,-1.778) v1(-3.785,-1.778) ; v1@-3.912,15.545 -3.15,15.545 -2.667,15.062 -1.854,15.062 -0.813,16.104 6.934,16.104 7.95,15.088 v1(8.89,15.088) v1@11.379,15.088 ; v1(-3.531,-19.634) -3.531,-16.078 v1(-3.708,-15.57) -3.708,-15.037 -4.572,-14.173 -4.572,-9.195 -1.295,-5.918 -1.295,-1.778 ; v1(-2.667,9.931) v1@-2.667,9.627 ; v1(-1.956,20.345) -4.775,20.345 v1(-6.629,22.2) -6.629,23.978 -6.528,24.079 ; C24.2@-1.892,8.852 v1@-2.667,9.627 ; v1(-0.533,1.626) -1.295,0.864 -1.295,-1.778 ; v1(-0.102,26.975) v1(-6.502,27.356) -6.528,24.079 ; v1@1.88,-1.778 v1(0.635,-1.778) v1(-0.686,-1.778) -1.295,-1.778 ; v1(1.93,-1.829) 2.718,-2.616 3.835,-2.616 4.14,-2.311 4.14,-1.6 3.988,-1.448 3.988,-0.356 3.073,0.559 3.073,3.454 3.937,4.318 7.595,4.318 ; v1(3.175,-19.99) 3.886,-19.99 ; 3.886,-20.015 3.886,-19.99 ; 3.886,-2.667 3.886,-19.99 ; SB9.2@4.734,8.509 4.734,7.407 v1(4.75,7.391) ; SB13.1@6.52,3.378 7.569,3.378 7.722,3.226 7.874,3.073 v1(7.823,3.327) 7.823,4.089 7.595,4.318 ; v1(7.01,27.381) 8.553,25.839 v1(9.049,25.839) 9.049,22.765 8.941,22.657 ; v1(7.493,5.08) 7.595,4.978 7.595,4.318 ; v1(7.899,-21.006) 6.883,-19.99 3.886,-19.99 ; v1(9.931,-50.749) v1@9.931,-50.724 ; v1(10.033,21.565) 8.941,22.657 ; v1(10.49,-23.901) 10.363,-23.774 7.874,-23.774 v1(7.366,-24.282) 7.366,-28.854 12.802,-34.29 v1(23.622,-34.29) ; v1@11.455,15.011 v1(13.005,15.011) 13.37,15.377 v1(13.37,19.355) 15.245,19.355 15.367,19.355 v1(15.245,19.477) ; -7.899,2.896 -6.985,3.81 ; -7.899,2.896 -7.137,2.896 -6.985,3.048 -6.985,3.81 ; -6.528,24.079 -5.105,22.657 8.941,22.657
  other v1: -25.4,-58.42 -16.51,-58.42 -11.43,-58.42 -6.35,-58.42 -1.27,-58.42 3.81,-58.42 8.89,-58.42 13.97,-58.42 19.05,-58.42 24.13,-58.42 25.4,-57.15 -25.4,-54.61 -15.24,-54.61 -3.81,-54.61 1.27,-54.61 6.35,-54.61 11.43,-54.61 15.24,-54.61 25.4,-52.07 -11.43,-50.8 -3.81,-50.8 3.81,-50.8 12.7,-50.8 -25.4,-49.53 -7.62,-48.26 6.35,-48.26 -13.97,-46.99 25.4,-46.99 -11.43,-45.72 -25.349,-44.45 25.4,-41.91 12.065,-40.64 -8.255,-40.005 -25.4,-39.37 -12.7,-39.37 8.89,-39.37 17.145,-39.37 16.51,-36.83 25.4,-36.83 -25.4,-34.29 -13.335,-33.655 25.4,-31.75 -25.4,-29.21 25.4,-26.67 -25.4,-24.13 25.4,-21.59 -25.4,-19.05 25.4,-16.51 -25.4,-13.97 2.54,-11.43 25.4,-11.43 -10.16,-10.16 -25.4,-8.89 0,-7.62 -7.62,-6.35 25.4,-6.35 -25.4,-3.81 25.4,-1.27 -25.4,1.27 25.4,3.81 -25.4,6.35 25.4,8.89 9.271,9.652 0.508,9.906 -25.4,11.43 25.4,13.97 11.43,15.037 -25.4,16.51 25.4,19.05 -25.4,21.59 -15.24,21.59 25.4,22.86 -25.4,27.94 -20.32,27.94 -15.24,27.94 8.89,27.94 15.24,27.94 20.955,27.94 25.4,27.94 -8.28,27.991
  other v2: -21.59,-58.42
LED_STLINK: R3.1 R4.1 U2.30 | length 20
  Top Layer w0.16: -11.278,17.78 -9.525,17.78 -6.325,14.58 -6.325,14.097 ; -6.336,14.086 -6.325,14.097 ; U2.30@-0.893,11.108 -0.893,10.566 -2.29,9.169 -2.896,9.169 -6.325,12.598 -6.325,14.097
  Top Layer w0.2: R3.1@-12.573,19.075 -12.573,18.085 -12.268,17.78 -11.278,17.78 -11.278,19.05 R4.1@-11.303,19.075
MCO: C24.1 R34.2 SB18.1 | length 28.5
  Bottom Layer w0.16: SB18.1@-4.42,-17.28 -4.42,-15.164 -5.029,-14.554 -5.029,-9.093 -1.803,-5.867 -1.803,3.099 -1.321,3.581 -1.321,5.334 -0.635,6.02 R34.2@-0.635,7.671 R34.2@-0.635,7.735 ; C24.1@-1.905,7.645 -0.724,7.645 -0.667,7.703 R34.2@-0.648,7.722 ; R34.2@-0.648,7.671 R34.2@-0.648,7.722 ; R34.2@-0.648,7.722 R34.2@-0.635,7.735 ; R34.2@-0.648,7.722 -0.648,7.735 R34.2@-0.635,7.735
NetB1_3: B1.3 B1.4 C22.1 R28.2 R29.2 | length 16.6
  Top Layer w0.2: B1.3@-12.805,-42.255 B1.4@-3.705,-42.255 -1.181,-42.255 R29.2@-0.869,-41.942 ; C22.1@-0.869,-44.455 R29.2@-0.869,-41.942 ; R28.2@-0.584,-40.005 -0.584,-41.658 R29.2@-0.831,-41.905 R29.2@-0.869,-41.942
NetB2_1: B2.1 B2.2 C23.2 R33.1 SB4.2 | length 21.8
  Top Layer w0.3: B2.2@3.705,-42.255 B2.1@12.805,-42.255 12.805,-45.034 ; C23.2@11.395,-48.895 11.626,-48.895 12.776,-48.895 12.878,-48.793 12.878,-46.939 ; R33.1@11.405,-46.99 11.455,-46.939 12.805,-46.939 ; 11.875,-45.034 11.779,-44.938 12.708,-44.938 12.805,-45.034 ; 12.805,-46.99 12.805,-46.939 ; 12.805,-46.939 12.878,-46.939 ; 12.805,-46.939 12.805,-45.034 ; 12.805,-45.034 12.878,-45.107 12.878,-46.939
NetC3_2: C3.2 U1.4 | length 2.4
  Top Layer w0.5: C3.2@8.895,17.976 8.895,18.928 9.21,19.243 U1.4@9.21,20.24
NetC4_1: C4.1 C5.2 D2.1 U1.5 | length 5.9
  Top Layer w0.4: 14.427,18.009 14.707,18.288 D2.1@15.24,18.288
  Top Layer w0.635: U1.5@11.11,20.24 11.11,19.37 11.425,19.055 C4.1@11.425,18.014 13.303,18.014 C5.2@13.34,17.976 ; C5.2@13.792,18.009 14.427,18.009
NetC13_1: C13.1 R22.2 X2.2 | length 6.3
  Top Layer w0.3: X2.2@-11.929,-13.33 -11.929,-13.912 -10.155,-15.685 R22.2@-10.155,-16.949 -10.118,-16.911 C13.1@-8.26,-16.911
NetC14_1: C14.1 R23.1 X2.1 | length 7.6
  Top Layer w0.3: X2.1@-6.778,-13.259 X2.1@-6.849,-13.33 -5.071,-13.33 -4.45,-13.951 C14.1@-4.45,-16.911 -6.35,-16.911 R23.1@-6.355,-16.911
NetC15_1: C15.1 R24.1 X3.4 | length 4.1
  Top Layer w0.3: C15.1@-2.545,-16.911 -0.64,-16.911 -0.64,-15.296 -0.33,-14.986 X3.4@-0.33,-14.815
NetC16_1: C16.1 R25.1 X3.1 | length 4.1
  Top Layer w0.3: R25.1@1.265,-16.911 1.27,-16.911 C16.1@3.17,-16.911 3.17,-15.115 X3.1@2.87,-14.815
NetC22_2: C22.2 R32.1 | length 2
  Top Layer w0.16: R32.1@0.61,-46.355 0.831,-46.133 C22.2@0.831,-44.455
NetCN1_2: CN1.2 R8.1 | length 2.9
  Top Layer w0.2: CN1.2@0.8,21.36 0.8,19.952 1.265,19.487 R8.1@1.265,18.649
NetCN1_3: CN1.3 R6.1 R7.1 | length 4.3
  Top Layer w0.2: R6.1@-1.905,18.39 -1.646,18.649 -0.64,18.649 -0.64,19.248 0,19.888 CN1.3@0,21.36
NetCN1_4: CN1.4 R5.1 | length 4.7
  Top Layer w0.16: R5.1@-3.175,18.39 -3.099,18.466 -3.099,19.202 -2.565,19.736 -1.143,19.736 -0.787,20.091 CN1.4@-0.787,21.26
NetCN2_1: CN2.1 SB5.1 SB6.2 | length 8
  Bottom Layer w0.3: SB5.1@5.849,13.589 CN2.1@11.913,13.589 SB6.2@13.878,13.589
NetCN2_2: CN2.2 SB7.1 SB8.2 | length 8.2
  Bottom Layer w0.3: SB7.1@5.834,11.049 CN2.2@11.913,11.049 SB8.2@14.005,11.049
NetCN2_3: CN2.3 SB9.1 SB10.2 | length 8.2
  Bottom Layer w0.3: SB9.1@5.834,8.509 CN2.3@11.913,8.509 SB10.2@14.005,8.509
NetCN2_4: CN2.4 SB11.1 SB12.2 | length 8.2
  Bottom Layer w0.16: SB11.1@5.834,5.969 CN2.4@11.913,5.969 SB12.2@14.005,5.969
NetCN3_1: CN3.1 D3.1 R9.1 | length 5.1
  Top Layer w0.16: CN3.1@-13.97,12.7 -12.09,12.7 ; D3.1@-11.303,13.97 -11.811,13.97 -12.09,13.691 -12.09,12.7 ; R9.1@-10.77,12.7 -12.09,12.7
NetCN3_2: CN3.2 R12.1 | length 3.2
  Top Layer w0.16: CN3.2@-13.97,10.16 R12.1@-10.77,10.16
NetCN3_4: CN3.4 R14.1 | length 3.2
  Top Layer w0.16: CN3.4@-13.97,5.08 R14.1@-10.77,5.08
NetCN3_5: CN3.5 R15.1 | length 3.2
  Top Layer w0.16: CN3.5@-13.97,2.54 R15.1@-10.77,2.54
NetCN3_6: CN3.6 R17.1 | length 3.2
  Top Layer w0.16: CN3.6@-13.97,0 R17.1@-10.77,0
NetD3_2: D3.2 R10.1 | length 2.6
  Top Layer w0.16: D3.2@-9.017,13.97 -7.823,13.97 -7.62,13.767 R10.1@-7.62,12.675
NetLD1_1: LD1.1 R2.1 | length 1.9
  Top Layer w0.2: LD1.1@10.79,27.539 11.049,27.28 R2.1@12.624,27.28
NetLD2_2: LD2.2 R4.2 | length 2
  Top Layer w0.16: R4.2@-11.303,20.269 -11.303,21.995 LD2.2@-11.303,22.225
NetLD2_3: LD2.3 R3.2 | length 1.8
  Top Layer w0.16: LD2.3@-12.688,21.995 -12.688,20.384 R3.2@-12.573,20.269
NetLD2_4: LD2.4 R1.1 | length 1.7
  Top Layer w0.16: LD2.4@-12.688,24.995 -12.688,26.53 R1.1@-12.548,26.67
NetLD3_1: LD3.1 R30.1 | length 2.1
  Top Layer w0.16: LD3.1@-15.245,-47.391 -15.235,-47.381 R30.1@-15.235,-45.319
NetLD4_1: LD4.1 R31.1 | length 2.1
  Top Layer w0.2: LD4.1@15.235,-47.391 15.245,-47.381 R31.1@15.245,-45.319
NetR13_2: R13.2 U2.44 | length 4.8
  Top Layer w0.16: R13.2@-9.55,7.62 -7.659,7.62 -6.147,6.108 U2.44@-5.393,6.108
NetR18_2: R18.2 U2.2 | length 3.4
  Top Layer w0.2: R18.2@-5.08,0.584 -5.08,1.346 -4.801,1.626 -3.632,1.626 -3.393,1.865 U2.2@-3.393,2.608
NetR19_2: R19.2 U2.3 | length 2.4
  Top Layer w0.2: R19.2@-3.81,0.584 -3.81,0.813 -2.893,1.73 U2.3@-2.893,2.608
NetR22_1: R22.1 SB16.1 U3.6 | length 11.8
  Top Layer w0.16: -10.155,-19.284 v1@-10.155,-19.66 ; R22.1@-10.155,-18.649 -10.16,-18.654 v1(-10.16,-19.66) v1@-10.155,-19.66 ; U3.6@-2.56,-21.78 -2.56,-20.859 -2.743,-20.676 -6.553,-20.676 -6.883,-20.345 -9.144,-20.345 -9.83,-19.66 v1@-10.155,-19.66
  Bottom Layer w0.16: v1(-10.16,-19.66) SB16.1@-10.16,-18.28
NetR23_2: R23.2 SB17.2 SB18.2 U3.5 | length 10.6
  Top Layer w0.16: R23.2@-6.355,-18.632 -6.355,-18.611 -6.375,-18.632 v1(-6.375,-19.888) -5.969,-20.295 -2.184,-20.295 -2.06,-20.419 U3.5@-2.06,-21.78
  Bottom Layer w0.16: v1(-6.375,-19.888) -6.35,-19.863 SB17.2@-6.35,-18.38 SB18.2@-4.445,-18.38
NetR24_2: R24.2 SB20.2 U3.4 | length 4.9
  Top Layer w0.16: U3.4@-1.56,-21.78 -1.56,-20.127 -1.295,-19.863 -0.64,-19.863 v1(-0.635,-19.71) v1@-0.64,-19.867
  Top Layer w0.3: v1@-0.64,-19.867 -0.64,-19.863 -0.64,-19.71 R24.2@-0.64,-18.611
  Bottom Layer w0.16: v1(-0.635,-19.71) -0.635,-19.015
NetR25_2: R25.2 SB21.2 U3.3 | length 6.3
  Top Layer w0.16: U3.3@-1.06,-21.78 -1.06,-20.618 -0.762,-20.32 0.66,-20.32 v1(1.245,-19.736) 1.265,-19.715 R25.2@1.265,-18.611
  Bottom Layer w0.16: v1(1.245,-19.736) 1.245,-18.405 SB21.2@1.27,-18.38
NetR26_1: R26.1 SB2.1 | length 2.3
  Top Layer w0.16: R26.1@8.108,-26.411 8.971,-26.411 9.398,-25.984 SB2.1@9.398,-25.111
NetR28_1: R28.1 SB3.2 | length 1.9
  Top Layer w0.16: SB3.2@0.6,-38.1 0.6,-39.995 R28.1@0.61,-40.005
NetR34_1: R34.1 U2.29 | length 2.3
  Top Layer w0.16: v1(-0.61,10.008) -0.393,10.224 U2.29@-0.393,11.108
  Bottom Layer w0.16: R34.1@-0.648,8.928 -0.61,8.967 v1(-0.61,10.008)
NRST: P1.10 SB4.1 SB19.2 U3.7 | length 74.3
  Top Layer w0.16: P1.10@-19.304,2.54 -19.16,2.414 -18.708,2.018 -17.247,0.737 ; P1.10@-19.05,2.54 -17.247,0.737 ; v1(-6.248,-30.277) -2.54,-26.568 v1(-2.54,-23.114) -3.06,-22.594 U3.7@-3.06,-21.78 ; v1(-2.489,-13.132) -5.334,-10.287 -7.62,-10.287 -17.247,-0.66 -17.247,0.737 ; v1(10.262,-43.713) 10.295,-43.747 SB4.1@10.295,-45.085
  Bottom Layer w0.16: v1(-6.248,-30.277) -6.248,-31.852 -0.737,-37.363 8.28,-37.363 10.262,-39.345 v1(10.262,-43.713) ; v1(-2.54,-23.114) SB19.2@-2.54,-18.38 ; v1(-2.489,-13.132) -2.489,-13.868 -1.626,-14.732 -1.626,-17.891 -2.115,-18.38
OSC_IN: C10.2 U2.5 X1.2 | length 9
  Top Layer w0.2: X1.2@-4.309,-3.932 -2.941,-3.932 -1.893,-2.884 -1.893,0.635 ; C10.2@-2.54,0.584 -1.944,0.584 -1.893,0.635 ; U2.5@-1.893,2.608 -1.893,0.635
OSC_OUT: C11.2 U2.6 X1.1 | length 8.8
  Top Layer w0.2: U2.6@-1.393,2.608 -1.393,-2.9 -1.111,-3.181 -0.361,-3.932 X1.1@0.771,-3.932 ; -1.368,0.584 C11.2@-0.635,0.584
PA0: P1.15 SB3.1 U3.14 | length 43.8
  Top Layer w0.16: P1.15@-19.05,-10.16 -20.371,-11.481 -20.371,-16.154 -19.99,-16.535 -17.17,-16.535 -10.846,-22.86 -6.807,-22.86 -6.579,-22.631 -6.579,-21.78 U3.14@-6.579,-21.031 ; -7.493,-22.911 -7.595,-23.012 -7.595,-24.714 -6.909,-25.4 v1(-6.909,-31.217) ; v1(-1.829,-38.1) SB3.1@-0.5,-38.1
  Bottom Layer w0.16: v1(-6.909,-31.217) -6.909,-31.662 -1.829,-36.742 v1(-1.829,-38.1)
PA1: P1.16 U3.15 | length 16.3
  Top Layer w0.16: P1.16@-19.05,-12.7 -18.542,-12.7 -10.541,-20.701 -7.29,-20.701 -7.074,-20.917 -7.06,-20.917 U3.15@-7.06,-21.78
PA2: P1.17 U3.16 | length 14.5
  Top Layer w0.2: P1.17@-19.304,-15.24 P1.17@-19.05,-15.24 -17.526,-15.24 -10.986,-21.78 U3.16@-7.56,-21.78
PA3: P1.18 U3.17 | length 12.4
  Top Layer w0.2: P1.18@-19.304,-17.78 P1.18@-19.05,-17.78 -17.399,-17.78 -11.624,-23.555 U3.17@-9.335,-23.555
PA4: P1.21 U3.20 | length 9.9
  Top Layer w0.16: P1.21@-19.05,-25.4 -18.705,-25.055 U3.20@-9.335,-25.055
PA5: P1.22 U3.21 | length 10.7
  Top Layer w0.16: P1.22@-19.05,-27.94 -16.665,-25.555 U3.21@-9.335,-25.555
PA6: P1.23 U3.22 | length 12.1
  Top Layer w0.16: P1.23@-19.05,-30.48 -19.05,-29.591 -15.514,-26.055 U3.22@-9.335,-26.055
PA7: P1.24 U3.23 | length 14.1
  Top Layer w0.16: P1.24@-19.05,-33.02 -17.78,-31.75 -17.78,-28.891 -15.444,-26.555 U3.23@-9.335,-26.555
PA8: P2.25 U3.41 | length 25.5
  Top Layer w0.16: U3.41@-3.56,-32.83 -3.56,-34.108 -1.6,-36.068 1.778,-36.068 2.946,-34.9 15.85,-34.9 16.51,-35.56 P2.25@19.05,-35.56
PA9: P2.24 SB15.1 U3.42 | length 57.3
  Top Layer w0.16: U3.42@-3.06,-32.83 -3.06,-34.049 -1.372,-35.738 1.575,-35.738 2.756,-34.556 14.974,-34.556 16.51,-33.02 P2.24@19.05,-33.02 ; v1(8.788,-8.306) 10.135,-9.652 10.135,-16.459 9.754,-16.84 9.754,-19.736 v1(9.982,-19.964)
  Bottom Layer w0.16: v1(8.788,-8.306) 8.788,-6.273 SB15.1@8.846,-6.215 ; v1(9.982,-19.964) 9.982,-19.939 9.995,-19.952 10.211,-20.168 10.617,-20.168 12.903,-22.454 12.903,-27.635 18.288,-33.02 P2.24@19.05,-33.02
PA10: P2.23 SB14.1 U3.43 | length 58.7
  Top Layer w0.16: U3.43@-2.56,-32.83 -2.56,-33.965 -1.168,-35.357 1.448,-35.357 2.565,-34.239 14.021,-34.239 17.78,-30.48 P2.23@19.05,-30.48 ; v1(6.35,-8.357) 7.239,-7.468 9.601,-7.468 10.516,-8.382 10.516,-17.094 10.262,-17.348 10.262,-18.974 10.693,-19.406 v1(10.719,-19.38)
  Bottom Layer w0.16: v1(6.35,-8.357) SB14.1@6.35,-6.215 ; v1(10.719,-19.38) 11.405,-19.38 14.326,-22.301 14.326,-25.756 P2.23@19.05,-30.48